# Altium PCB sodomach_end.PcbDoc
Units mil, origin at the board's own origin, x right, y up, seen from the top; angles counter-clockwise.
Board outline 2362.2 x 1968.5 mil, 2 copper layers (Top Layer, Bottom Layer); 8 components, 27 nets, 46 pads, 0 vias.
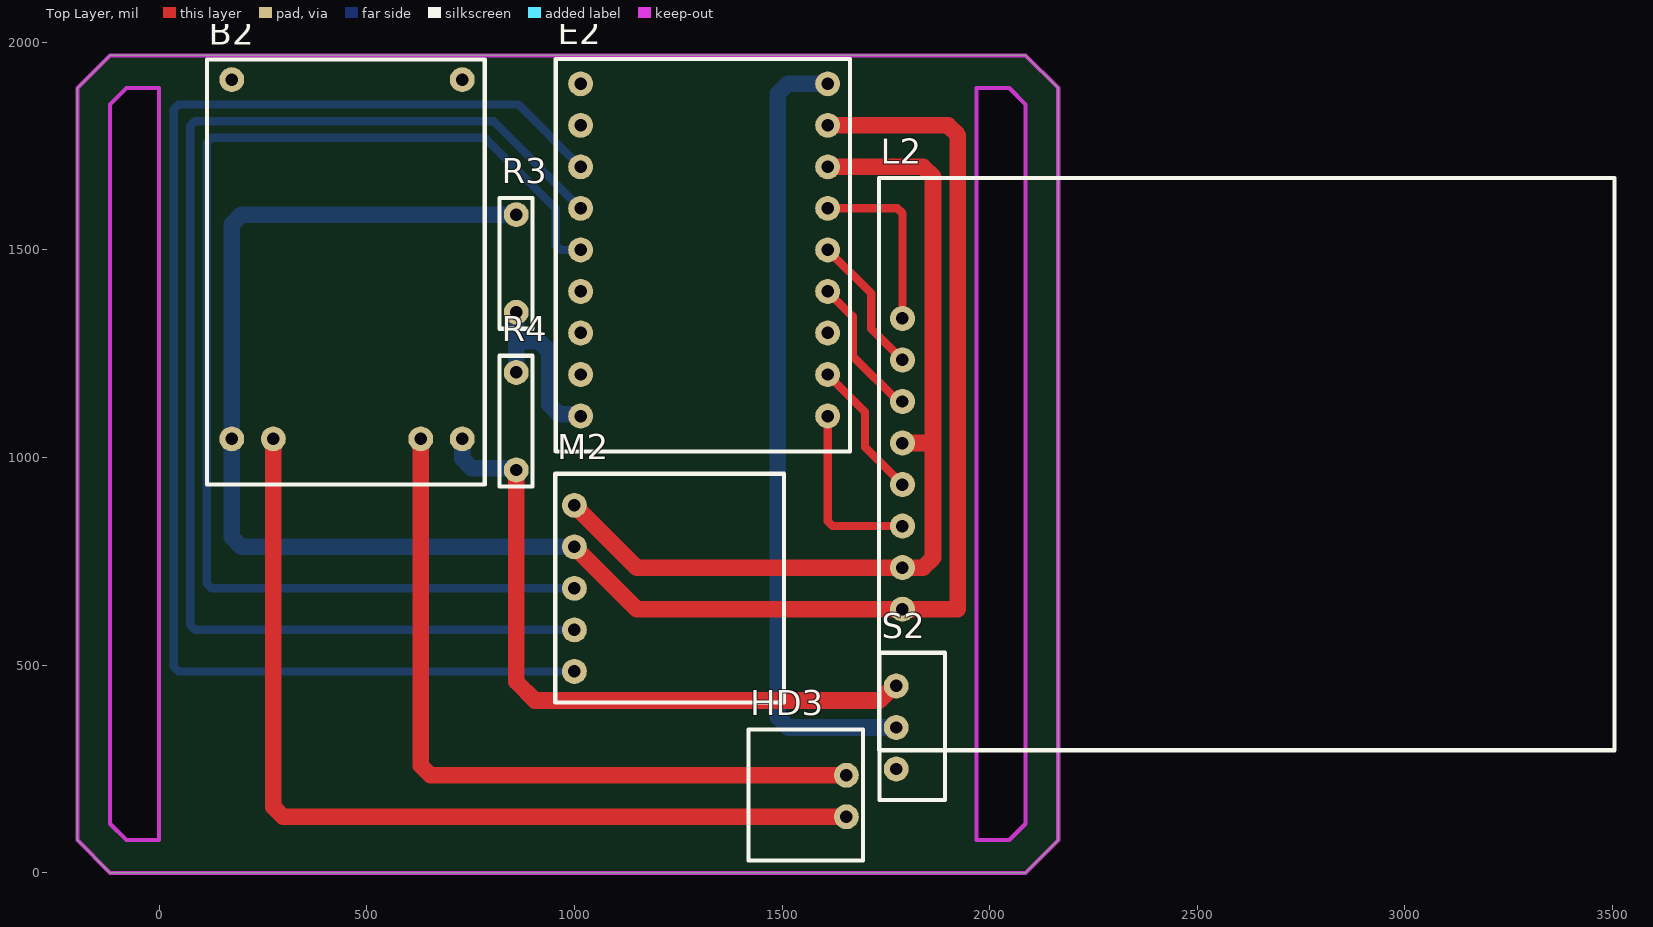
[diagram p0: Top Layer view]
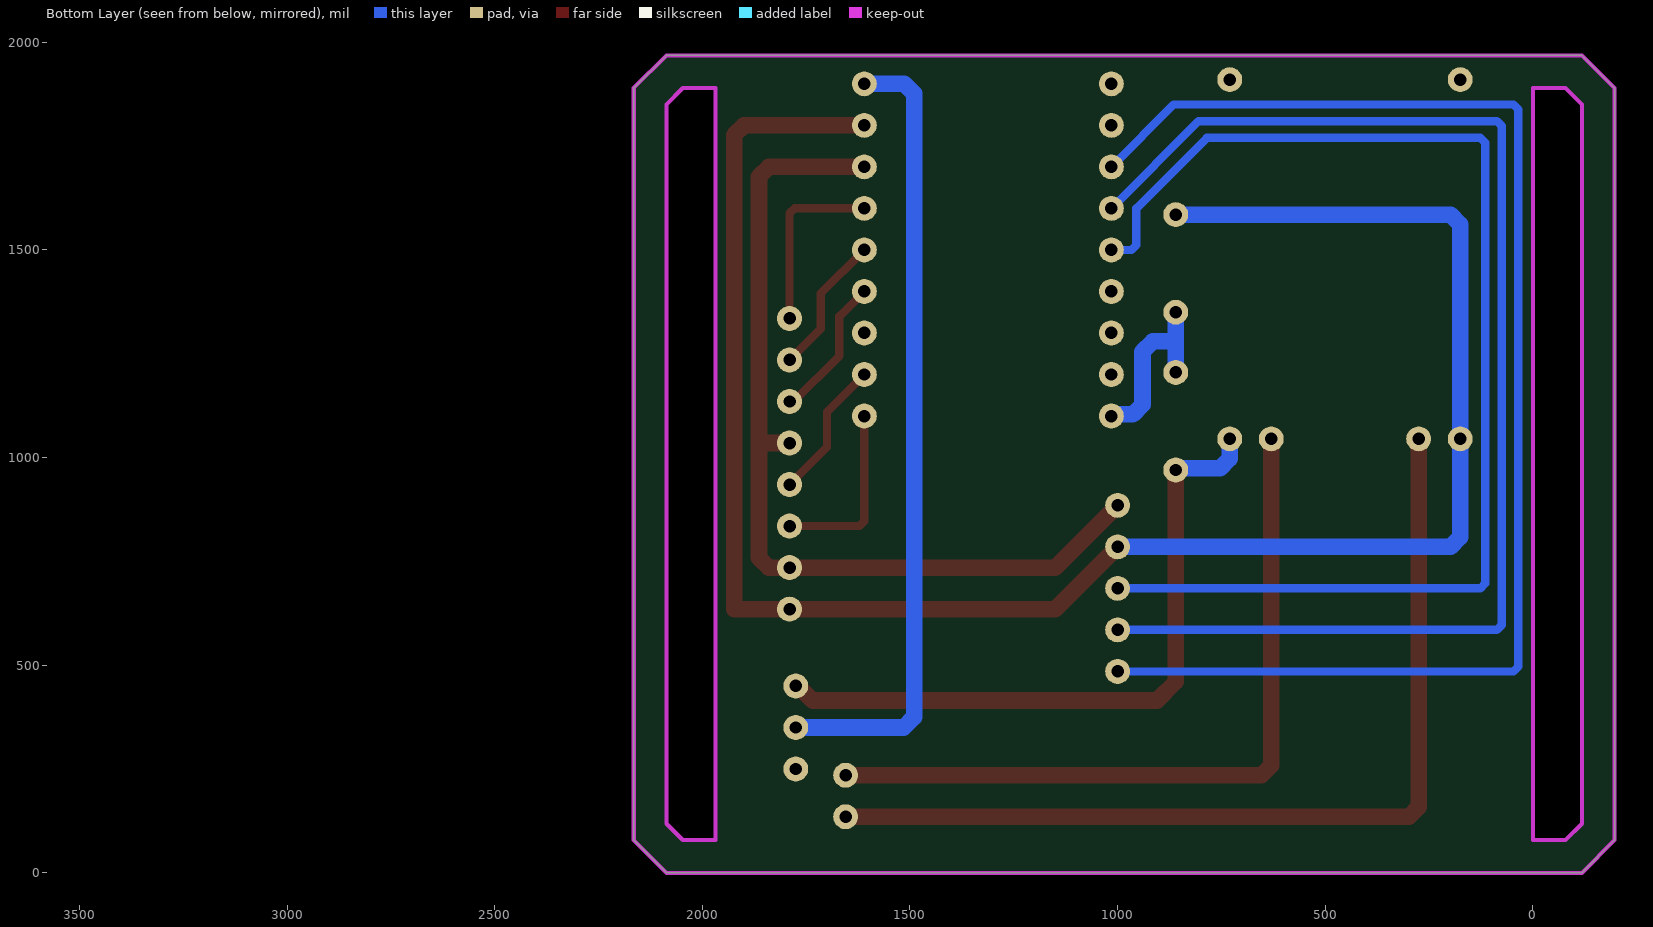
[diagram p1: Bottom Layer view, seen from below]

## Layer stack, top to bottom
Top Solder: solder mask 0.4, Solder Resist, Dk 3.5
Top Layer: signal copper 1.4
Dielectric 1: dielectric 12.6, FR-4, Dk 4.8
Bottom Layer: signal copper 1.4
Bottom Solder: solder mask 0.4, Solder Resist, Dk 3.5

## Board outline
-118.11,0 -196.85,78.74 -196.85,1889.76 -118.11,1968.5 2086.61,1968.5 2165.35,1889.76 2165.35,78.74 2086.61,0
cut-out: 1968.5,78.74 1968.5,1889.76 2047.24,1889.76 2086.61,1850.39 2086.61,118.11 2047.24,78.74
cut-out: -78.74,78.74 -118.11,118.11 -118.11,1850.39 -78.74,1889.76 0,1889.76 0,78.74

## Design rules (kind name [scope] priority, off if disabled: settings)
Clearance [All] p1: gap=20 ignorepadtopadclearanceinfootprint=FALSE
PolygonConnect [All] p1: connectstyle=Relief reliefconductorwidth=10 reliefentries=4 polygonreliefangle="90 Angle" airgapwidth=10
RoutingVias [All] p1: holewidth=28 width=50 viastyle="Through Hole" minholewidth=28 minwidth=50 maxholewidth=28 maxwidth=50
SolderMaskExpansion [All] p1: expansion=4 istentingtop=FALSE
SupplyNets "Schematic Supply Nets" [InNet('GND')] p1: voltage=0.000
Width B2_5 [InNet('NetB2_5')] p1: maxlimit=40 minlimit=40 preferedwidth=40
Width B2_4 [InNet('NetB2_4')] p2: maxlimit=40 minlimit=40 preferedwidth=40
Width B2_3 [InNet('NetB2_3')] p3: maxlimit=40 minlimit=40 preferedwidth=40
Width POWER [InNet('POWER')] p4: maxlimit=40 minlimit=40 preferedwidth=40
Width analog [InNet('Analog')] p5: maxlimit=40 minlimit=40 preferedwidth=40
Width hd2 [InNet('NetHD2_1')] p6: maxlimit=40 minlimit=40 preferedwidth=40
Width B1_5 [InNet('NetB1_5')] p7: maxlimit=40 minlimit=40 preferedwidth=40
Width B1_4 [InNet('NetB1_4')] p8: maxlimit=40 minlimit=40 preferedwidth=40
Width B1_3 [InNet('NetB1_3')] p9: maxlimit=40 minlimit=40 preferedwidth=40
Width B1_2 [InNet('NetB1_2')] p10: maxlimit=40 minlimit=40 preferedwidth=40
Width GND [InNet('GND')] p11: maxlimit=40 minlimit=40 preferedwidth=40
Width VCC [InNet('VCC')] p12: maxlimit=40 minlimit=40 preferedwidth=40
Width [All] p13: maxlimit=20 minlimit=20 preferedwidth=20
30 further rules are at their usual default settings.

## Components (designator, comment, footprint, x,y, rotation, side; value= is the part's Value field where it differs from the comment)
B2 "tp4056" tp4056 115,935 r0 top
E2 "esp32s3" esp32s3 955,1015 r0 top
HD3 "header" header 1695,30 r90 top
L2 "gc9a01" gc9a01 3505,295 r90 top
M2 "max30102" max30102 1505,410 r90 top
R3 "res" res 820,1625 r270 top
R4 "res" res 820,1245 r270 top
S2 "switch" switch 1735,530 r270 top

## Footprints (in the part's own frame and the unit in brackets; to place one, negate y for a bottom-side part, rotate by r counter-clockwise, add the part's x,y. Pads: shape width x height; smd on the part's side, far side on the other; paste and mask are expansions set on the pad)
esp32s3 [mil]
  round 60 hole 30: 0(60,885) 1(60,785) 2(60,685) 3(60,585) 4(60,485) 5(60,385) 6(60,285) 7(60,185) 8(60,85) 9(655,85) 10(655,185) 11(655,285) 12(655,385) 13(655,485) 14(655,585) 15(655,685) 16(655,785) 17(655,885)
  silkscreen extent 0,0 709,945
gc9a01 [mil]
  round 60 hole 30: 0(340,1715) 1(440,1715) 2(540,1715) 3(640,1715) 4(740,1715) 5(840,1715) 6(940,1715) 7(1040,1715)
  silkscreen extent 0,0 1378,1772
header [mil]
  round 60 hole 30: 0(105,40) 1(205,40)
  silkscreen extent 0,0 315,276
max30102 [mil]
  round 60 hole 30: 0(75,505) 1(175,505) 2(275,505) 3(375,505) 4(475,505)
  silkscreen extent 0,0 551,551
res [mil]
  round 60 hole 30: 0(40,40) 1(275,40)
  silkscreen extent 0,0 315,79
switch [mil]
  round 60 hole 30: 0(80,40) 1(180,40) 2(280,40)
  silkscreen extent 0,0 354,157
tp4056 [mil]
  round 60 hole 30: 0(60,975) 1(615,975) 2(60,110) 3(160,110) 4(515,110) 5(615,110)
  silkscreen extent 0,0 669,1024

## Nets (pads, with @x,y where several pads share a name; then routed paths per layer and width w, separated by ;. In a path a pad name is that pad's centre, name@x,y a point inside that pad or via, vN(x,y) a via of type N, cw(c..) or ccw(c..) an arc to the next point about the centre after c; other vN are vias at no path point)
Analog: E2.8 R3.1 R4.0 | length 449.4
  Bottom Layer w40: R4.0 860,1280 ; R3.1 860,1280 ; E2.8 1011.17,1103.83 963.43,1103.83 940,1127.26 940,1255 915,1280 860,1280
GND: B2.2 E2.16 L2.0 M2.3 R3.0 | length 4733
  Top Layer w40: M2.3 1150,635 L2.0 1923.5,635 1923.5,1776.57 1900.07,1800 E2.16
  Bottom Layer w40: R3.0 198.43,1585 175,1561.57 B2.2 175,808.43 198.43,785 M2.3
NetB1_3: 
NetB1_4: 
NetB1_5: 
NetB2_3: B2.3 HD3.0 | length 2276.3
  Top Layer w40: B2.3 275,158.43 298.43,135 HD3.0
NetB2_4: B2.4 HD3.1 | length 1821.3
  Top Layer w40: B2.4 630,258.43 653.43,235 HD3.1
NetB2_5: B2.5 R4.1 S2.0 | length 1647.2
  Top Layer w40: R4.1 860,460 905,415 1734.59,415 1769.59,450 S2.0
  Bottom Layer w40: B2.5 730,997.26 753.43,973.83 856.17,973.83 R4.1
NetE1_2: 
NetE1_3: 
NetE1_4: 
NetE1_9: 
NetE1_10: 
NetE1_12: 
NetE1_13: 
NetE1_14: 
NetE2_2: E2.2 M2.0 | length 3358.4
  Bottom Layer w20: M2.0 46.72,485 35,496.72 35,1838.28 46.72,1850 865,1850 E2.2
NetE2_3: E2.3 M2.1 | length 3163.3
  Bottom Layer w20: M2.1 86.72,585 75,596.72 75,1798.28 86.72,1810 805,1810 E2.3
NetE2_4: E2.4 M2.2 | length 3019.8
  Bottom Layer w20: M2.2 126.72,685 115,696.72 115,1758.28 126.72,1770 785,1770 955,1600 955,1511.72 966.72,1500 E2.4
NetE2_9: E2.9 L2.2 | length 438.1
  Top Layer w20: E2.9 1610,846.72 1621.72,835 L2.2
NetE2_10: E2.10 L2.3 | length 339.6
  Top Layer w20: E2.10 1700,1110 1700,1025 L2.3
NetE2_12: E2.12 L2.5 | length 345.4
  Top Layer w20: E2.12 1670,1340 1670,1245 1780,1135 L2.5
NetE2_13: E2.13 L2.6 | length 339.6
  Top Layer w20: E2.13 1715,1395 1715,1310 L2.6
NetE2_14: E2.14 L2.7 | length 438.1
  Top Layer w20: E2.14 1778.28,1600 1790,1588.28 L2.7
NetHD2_1: 
POWER: E2.17 S2.1 | length 1926.6
  Bottom Layer w40: E2.17 1513.43,1900 1490,1876.57 1490,375 1515,350 S2.1
VCC: E2.15 L2.1 L2.4 M2.4 | length 2190.2
  Top Layer w40: M2.4 1150,735 L2.1 1840.07,735 1863.5,758.43 1863.5,1035 ; E2.15 1840.07,1700 1863.5,1676.57 1863.5,1035 ; L2.4 1863.5,1035
pads on no net: B2.0 B2.1 E2.0 E2.1 E2.5 E2.6 E2.7 E2.11 S2.2

## Keep-outs
Keep-Out Layer:
  lines w10: -78.74,1889.76 -118.11,1850.39 -118.11,118.11 -78.74,78.74 0,78.74 0,1889.76 -78.74,1889.76 ; -78.74,1889.76 -78.74,1889.76 ; 2047.24,78.74 2086.61,118.11 2086.61,1850.39 2047.24,1889.76 1968.5,1889.76 1968.5,78.74 2047.24,78.74 ; 2047.24,78.74 2047.24,78.74 ; -196.85,78.74 -118.11,0 0,0 1968.5,0 2086.61,0 2165.35,78.74 2165.35,1889.76 2086.61,1968.5 1968.5,1968.5 0,1968.5 -118.11,1968.5 -196.85,1889.76 -196.85,78.74